# Altium PCB Stepper Teensy Breakout.PcbDoc
Units mm, origin at the board's own origin, x right, y up, seen from the top; angles counter-clockwise.
Board outline 195.58 x 98.55 mm, 2 copper layers (Top Layer, Bottom Layer); 39 components, 41 nets, 243 pads, 7 vias.
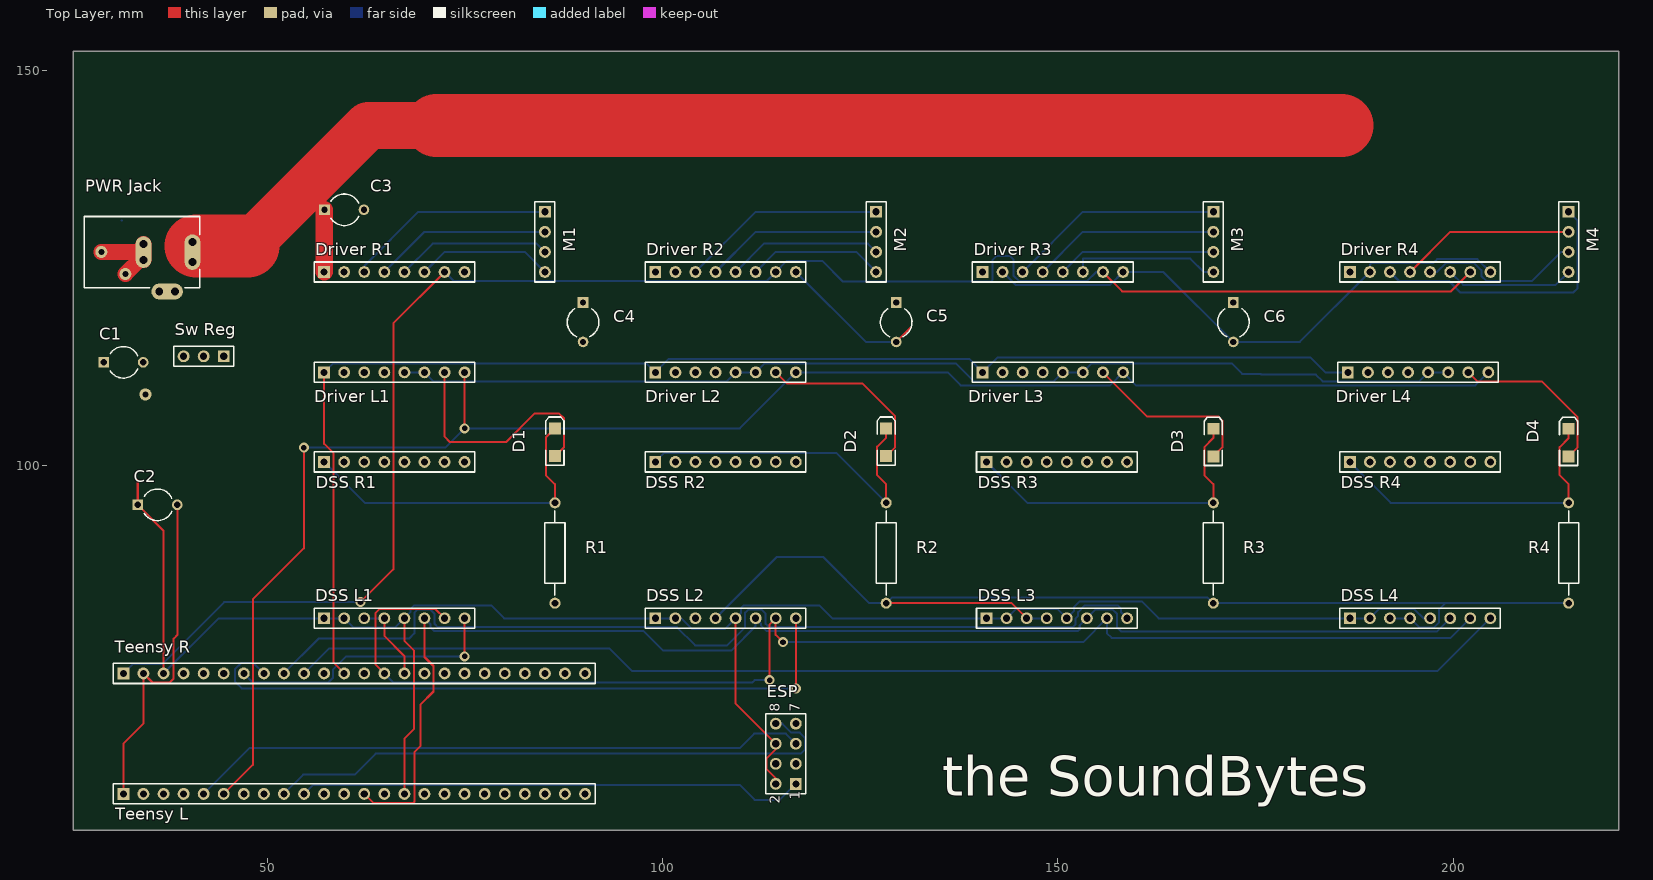
[diagram p0: Top Layer view]
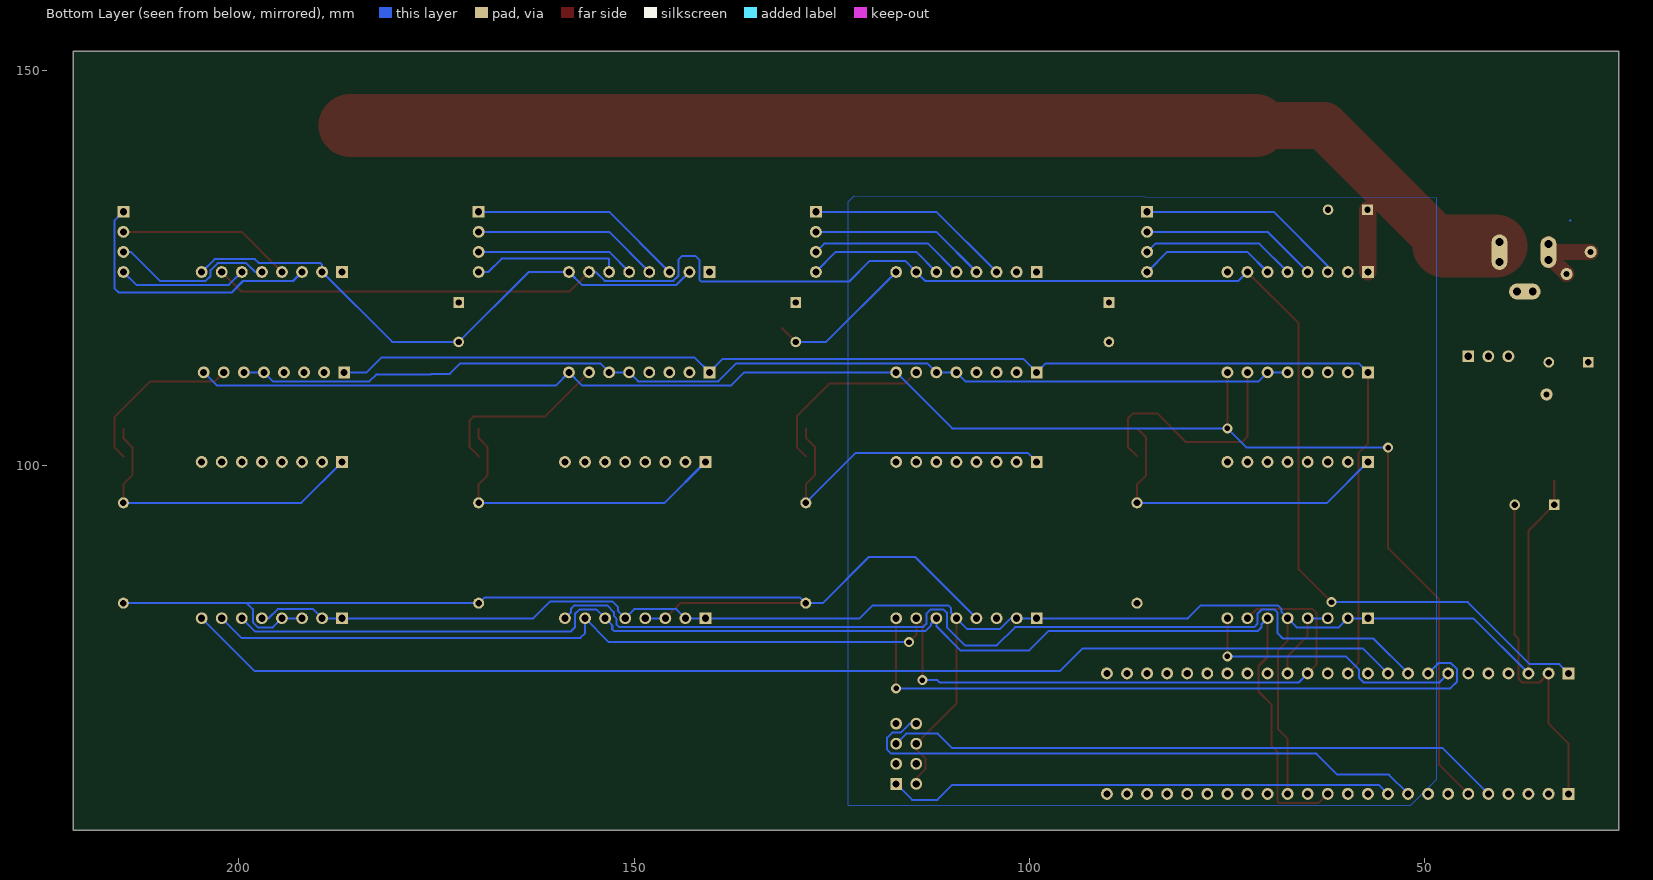
[diagram p1: Bottom Layer view, seen from below]

## Layer stack, top to bottom
Top Solder: solder mask 0.0102, Solder Resist, Dk 3.5
Top Layer: signal copper 0.0356
Dielectric 1: dielectric 0.32, FR-4, Dk 4.8
Bottom Layer: signal copper 0.0356
Bottom Solder: solder mask 0.0102, Solder Resist, Dk 3.5

## Board outline
25.4,53.848 220.98,53.848 220.98,152.4 25.4,152.4

## Design rules (kind name [scope] priority, off if disabled: settings)
Clearance [All] p1: gap=0.254
PolygonConnect [All] p1: connectstyle=Relief reliefconductorwidth=0.254 reliefentries=4 polygonreliefangle="90 Angle" airgapwidth=0.254
RoutingVias [All] p1: holewidth=0.711 width=1.27 viastyle="Through Hole" minholewidth=0.711 minwidth=1.27 maxholewidth=0.711 maxwidth=1.27
SolderMaskExpansion [All] p1: expansion=0.102
Width Width_1 [InNet('VMOT')] p1: maxlimit=0.254 minlimit=0.254 preferedwidth=0.254 minimp=50.000000 maximp=50.000000 favimp=50.000000
Width [InNet('VMOT')] p2: maxlimit=8.2 minlimit=7.6 preferedwidth=8 minimp=50.000000 maximp=50.000000 favimp=50.000000
30 further rules are at their usual default settings.

## Components (designator, comment, footprint, x,y, rotation, side; value= is the part's Value field where it differs from the comment)
C1 "Cap2" CAPR5-4X5 31.75,113.03 r0 top
C2 "Cap2" CAPR5-4X5 36.068,94.996 r0 top
C3 "" CAPR5-4X5 59.69,132.334 r0 top
C4 "Cap2" CAPR5-4X5 89.916,118.11 r270 top
C5 "Cap2" CAPR5-4X5 129.54,118.11 r270 top
C6 "Cap2" CAPR5-4X5 172.212,118.11 r270 top
D1 "LED2" 3.2X1.6X1.1 86.36,102.91 r90 top
D2 "LED2" 3.2X1.6X1.1 128.27,102.91 r90 top
D3 "LED2" 3.2X1.6X1.1 169.672,102.87 r90 top
D4 "LED2" 3.2X1.6X1.1 214.63,102.87 r90 top
"Driver L1" "Header 8" HDR1X8 57.15,111.76 r0 top locked
"Driver L2" "Header 8" HDR1X8 99.06,111.76 r0 top locked
"Driver L3" "Header 8" HDR1X8 140.462,111.76 r0 top locked
"Driver L4" "Header 8" HDR1X8 186.69,111.76 r0 top locked
"Driver R1" "Header 8" HDR1X8 57.15,124.46 r0 top locked
"Driver R2" "Header 8" HDR1X8 99.06,124.46 r0 top locked
"Driver R3" "Header 8" HDR1X8 140.462,124.46 r0 top locked
"Driver R4" "Header 8" HDR1X8 186.944,124.46 r0 top locked
"DSS L1" "Header 8" HDR1X8 57.15,80.645 r0 top locked
"DSS L2" "Header 8" HDR1X8 99.06,80.645 r0 top
"DSS L3" "Header 8" HDR1X8 140.97,80.645 r0 top locked
"DSS L4" "Header 8" HDR1X8 186.944,80.645 r0 top
"DSS R1" "Header 8" HDR1X8 57.15,100.42 r0 top locked
"DSS R2" "Header 8" HDR1X8 99.06,100.42 r0 top
"DSS R3" "Header 8" HDR1X8 140.97,100.42 r0 top
"DSS R4" "Header 8" HDR1X8 186.944,100.42 r0 top
ESP "Header 4X2" HDR2X4 116.84,59.69 r90 top
M1 "Header 4" HDR1X4 85.09,132.08 r270 top (schematic designator "Motor 1")
M2 "Header 4" HDR1X4 127,132.08 r270 top (schematic designator "Motor 2")
M3 "Header 4" HDR1X4 169.672,132.08 r270 top (schematic designator "Motor 3")
M4 "Header 4" HDR1X4 214.63,132.08 r270 top (schematic designator "Motor 4")
"PWR Jack" "PWR2.5" KLD-0202 26.79,126.984 r0 top
R1 "Res Semi" AXIAL-0.5 86.36,88.9 r90 top
R2 "Res Semi" AXIAL-0.5 128.27,88.9 r90 top
R3 "Res Semi" AXIAL-0.5 169.672,88.9 r90 top
R4 "Res Semi" AXIAL-0.5 214.63,88.9 r90 top
"Sw Reg" "Header 3" HDR1X3 44.45,113.792 r180 top
"Teensy L" "Header 24" HDR1X24 31.75,58.42 r0 top locked
"Teensy R" "Header 24" HDR1X24 31.75,73.66 r0 top locked

## Footprints (in the part's own frame and the unit in brackets; to place one, negate y for a bottom-side part, rotate by r counter-clockwise, add the part's x,y. Pads: shape width x height; smd on the part's side, far side on the other; paste and mask are expansions set on the pad)
3.2X1.6X1.1 [mm] "SMT LED; 2 Flat Leads"
  rect 1.5x1.5 smd: 1(-1.75,0) 2(1.75,0)
  silkscreen extent -2.9,-1.15 3.2,1.15
AXIAL-0.5 [mm] "Axial Device, Thru-Hole; 2 Leads; 0.5 in Pin Spacing"
  round 1.4 hole 0.85: 1(-6.35,0) 2(6.35,0)
  silkscreen extent -5.33,-1.27 5.33,1.27
CAPR5-4X5 [mm] "Capacitor; 2 Leads"
  rect 1.35x1.35 hole 0.8: 1(-2.5,0)
  round 1.35 hole 0.8: 2(2.5,0)
  silkscreen extent -1.69,-2 1.82,2
HDR1X3 [mm] "Connector; Header; 3 Position"
  rect 1.5x1.5 hole 0.9: 1(0,0)
  round 1.5 hole 0.9: 2(2.54,0) 3(5.08,0)
  silkscreen extent -1.27,-1.27 6.35,1.27
HDR1X4 [mm] "Connector; Header; 4 Position"
  rect 1.5x1.5 hole 0.9: 1(0,0)
  round 1.5 hole 0.9: 2(2.54,0) 3(5.08,0) 4(7.62,0)
  silkscreen extent -1.27,-1.27 8.89,1.27
HDR1X8 [mm] "Connector; Header; 8 Position"
  rect 1.5x1.5 hole 0.9: 1(0,0)
  round 1.5 hole 0.9: 2(2.54,0) 3(5.08,0) 4(7.62,0) 5(10.16,0) 6(12.7,0) 7(15.24,0) 8(17.78,0)
  silkscreen extent -1.27,-1.27 19.05,1.27
HDR1X24 [mm] "Connector; Header; 24 Position"
  rect 1.5x1.5 hole 0.9: 1(0,0)
  round 1.5 hole 0.9: 2(2.54,0) 3(5.08,0) 4(7.62,0) 5(10.16,0) 6(12.7,0) 7(15.24,0) 8(17.78,0) 9(20.32,0) 10(22.86,0) 11(25.4,0) 12(27.94,0) 13(30.48,0) 14(33.02,0) 15(35.56,0) 16(38.1,0) 17(40.64,0) 18(43.18,0) 19(45.72,0) 20(48.26,0) 21(50.8,0) 22(53.34,0) 23(55.88,0) 24(58.42,0)
  silkscreen extent -1.27,-1.27 59.69,1.27
HDR2X4 [mm] "Connector; Header; 4x2 Position"
  rect 1.5x1.5 hole 0.9: 1(0,0)
  round 1.5 hole 0.9: 2(0,2.54) 3(2.54,0) 4(2.54,2.54) 5(5.08,0) 6(5.08,2.54) 7(7.62,0) 8(7.62,2.54)
  silkscreen extent -1.27,-1.27 8.89,3.81
KLD-0202 [mm] "DC Power Jack, 2.5mm, KLD Series, PCB Mount"
  oval 2x4.5 all layers, no hole: 1(13.7,0)
  round 1.5 hole 1: 1A(13.7,-1.25) 1B(13.7,1.25) 2A(7.5,-1) 2B(7.5,1) 3A(9.5,-5) 3B(11.5,-5)
  oval 2x4 all layers, no hole: 2(7.5,0)
  oval 4x2 all layers, no hole: 3(10.5,-5)
  silkscreen extent 0,-4.5 14.6,4.5

## Part data
C1 C2 C4 C5 C6: "Capacitor"
C3: library part Cap2, "Capacitor"
D1 D2 D3 D4: "Typical RED, GREEN, YELLOW, AMBER GaAs LED"
"Driver L1" "Driver L2" "Driver L3" "Driver L4" "Driver R1" "Driver R2" "Driver R3" "Driver R4" "DSS L1" "DSS L2" "DSS L3" "DSS L4" "DSS R1" "DSS R2" "DSS R3" "DSS R4": "Header, 8-Pin"
ESP: "Header, 4-Pin, Dual row"
M1 M2 M3 M4: "Header, 4-Pin"
"PWR Jack": "Low Voltage Power Supply Connector"
R1 R2 R3 R4: "Semiconductor Resistor"
"Sw Reg": "Header, 3-Pin"
"Teensy L" "Teensy R": "Header, 24-Pin"

## Free pads (board coordinates)
  round 1.524 hole 0.762: 2(28.956,127) 3(32.004,124.206) 4(34.544,108.966)

## Via types
v1: diameter 1.27, hole 0.711, Top Layer to Bottom Layer, 7 vias

## Nets (pads, with @x,y where several pads share a name; then routed paths per layer and width w, separated by ;. In a path a pad name is that pad's centre, name@x,y a point inside that pad or via, vN(x,y) a via of type N, cw(c..) or ccw(c..) an arc to the next point about the centre after c; other vN are vias at no path point)
1A_A: "Driver R1.5" M1.3 | length 19.7
  Bottom Layer w0.254: 67.31,124.46 70.891,128.041 84.049,128.041 M1.3
1A_B: "Driver R2.5" M2.3 | length 19.7
  Bottom Layer w0.254: 109.22,124.46 112.801,128.041 125.959,128.041 M2.3
1A_C: "Driver R3.5" M3.3 | length 20.1
  Bottom Layer w0.254: 150.622,124.46 153.162,127 M3.3
1A_D: "Driver R4.5" M4.3 | length 20.9
  Bottom Layer w0.254: 197.104,124.46 197.968,124.46 199.099,125.591 202.692,125.591 203.593,124.69 203.593,123.952 204.216,123.329 210.019,123.329 213.69,127 M4.3
1B_A: "Driver R1.6" M1.4 | length 17.3
  Bottom Layer w0.254: 69.85,124.46 72.39,127 82.55,127 M1.4
1B_B: "Driver R2.6" M2.4 | length 17.3
  Bottom Layer w0.254: 111.76,124.46 114.3,127 124.46,127 M2.4
1B_C: "Driver R3.6" M3.4 | length 18.9
  Bottom Layer w0.254: 153.162,124.46 153.162,126.162 166.776,126.162 168.478,124.46 M3.4
1B_D: "Driver R4.6" M4.4 | length 16.3
  Bottom Layer w0.254: 199.644,124.46 201.283,122.821 212.991,122.821 M4.4
2A_A: "Driver R1.4" M1.2 | length 22.4
  Bottom Layer w0.254: 64.77,124.46 69.85,129.54 M1.2
2A_B: "Driver R2.4" M2.2 | length 22.4
  Bottom Layer w0.254: 106.68,124.46 111.76,129.54 M2.2
2A_C: "Driver R3.4" M3.2 | length 23.7
  Bottom Layer w0.254: 148.082,124.46 153.162,129.54 M3.2
2A_D: "Driver R4.4" M4.2 | length 22.2
  Top Layer w0.254: 194.564,124.46 199.644,129.54 M4.2
2B_A: "Driver R1.3" M1.1 | length 26.5
  Bottom Layer w0.254: 62.23,124.46 62.23,125.222 69.088,132.08 M1.1
2B_B: "Driver R2.3" M2.1 | length 26
  Bottom Layer w0.254: 104.14,124.46 111.76,132.08 M2.1
2B_C: "Driver R3.3" M3.1 | length 27.3
  Bottom Layer w0.254: 145.542,124.46 153.162,132.08 M3.1
2B_D: "Driver R4.3" M4.1 | length 35.2
  Bottom Layer w0.254: 192.024,124.46 193.167,123.317 199.492,123.317 200.939,121.869 215.214,121.869 215.773,122.428 215.773,130.937 M4.1
3V3: "DSS L1.1" "DSS L1.2" "DSS L1.5" "DSS L2.1" "DSS L2.2" "DSS L2.5" "DSS L3.1" "DSS L3.2" "DSS L3.5" "DSS L4.1" "DSS L4.2" "DSS L4.5" "Sw Reg.3" "Teensy L.15" "Teensy R.3" C2.1 ESP.2 ESP.6 | length 245.5
  Top Layer w0.254: 33.568,98.069 C2.1 36.83,91.734 36.83,73.66 ; 67.31,58.42 67.31,65.405 68.555,66.65 68.555,76.53 67.31,77.775 67.31,80.645 ; 109.22,80.645 109.22,69.85 ESP.6 114.3,64.059 113.157,62.916 113.157,61.544 114.3,60.401 ESP.2
  Bottom Layer w0.254: 36.83,73.66 43.815,80.645 57.15,80.645 59.69,80.645 60.833,79.502 66.167,79.502 67.31,80.645 68.072,81.407 68.072,81.776 68.58,82.284 78.295,82.284 79.934,80.645 99.06,80.645 101.6,80.645 102.356,80.645 103.685,79.316 107.891,79.316 109.22,80.645 109.887,81.312 109.887,81.935 110.236,82.284 119.824,82.284 121.463,80.645 140.97,80.645 143.51,80.645 144.653,81.788 149.987,81.788 151.13,80.645 152.031,81.546 152.031,82.042 152.781,82.792 160.616,82.792 162.763,80.645 186.944,80.645 189.484,80.645 190.627,81.788 195.123,81.788 196.266,80.645 197.104,80.645
5V: "Driver R1.7" "Driver R2.7" "Driver R3.7" "Driver R4.7" "Teensy R.1" | length 220.1
  Top Layer w0.254: v1(61.747,82.677) 65.913,86.843 65.913,117.983 72.39,124.46 ; 155.702,124.46 158.14,122.022 199.746,122.022 202.184,124.46
  Bottom Layer w0.254: 31.75,73.66 32.918,74.828 36.652,74.828 44.501,82.677 v1(61.747,82.677) ; 72.39,124.46 73.533,123.317 113.157,123.317 114.3,124.46 115.697,125.857 120.193,125.857 122.809,123.241 141.478,123.241 141.743,123.506 141.743,125.995 142.24,126.492 143.903,126.492 144.411,125.984 144.411,123.952 145.034,123.329 153.733,123.329 154.864,124.46 155.702,124.46
CS1: "DSS L1.8" "Teensy R.7" | length 35.2
  Top Layer w0.254: v1(74.93,75.819) 74.93,80.645
  Bottom Layer w0.254: 46.99,73.66 48.133,72.517 57.658,72.517 58.293,73.152 58.293,74.168 59.944,75.819 v1(74.93,75.819)
CS2: "DSS L2.8" "Teensy R.8" | length 86.3
  Top Layer w0.254: v1(116.84,71.78) 116.84,80.645
  Bottom Layer w0.254: 49.53,73.66 48.209,74.981 46.66,74.981 45.847,74.168 45.847,72.644 46.711,71.78 v1(116.84,71.78)
CS3: "DSS L3.8" "Teensy R.9" | length 121.7
  Bottom Layer w0.254: 52.07,73.66 56.49,78.08 67.92,78.08 68.58,78.74 68.58,81.356 69,81.776 70.548,81.776 71.12,81.204 71.12,79.934 71.54,79.514 101.797,79.514 104.095,77.216 108.153,77.216 110.439,79.502 110.439,81.356 110.859,81.776 112.458,81.776 113.03,81.204 113.03,79.934 113.45,79.514 151.892,79.514 152.261,79.883 152.261,80.645 152.552,80.936 152.552,81.42 153.416,82.284 157.57,82.284 157.988,81.866 157.988,81.407 158.75,80.645
CS4: "DSS L4.8" "Teensy R.10" | length 155.4
  Bottom Layer w0.254: 54.61,73.66 57.785,76.835 93.243,76.835 96.139,73.939 198.018,73.939 204.724,80.645
DIR: "Driver L1.8" "Driver L2.8" "Driver L3.8" "Driver L4.8" "Teensy L.6" | length 211.6
  Top Layer w0.254: 44.45,58.42 48.133,62.103 48.133,83.033 54.585,89.484 v1(54.585,102.235) ; v1(74.93,104.673) 74.93,111.76
  Bottom Layer w0.254: v1(54.585,102.235) 72.492,102.235 v1(74.93,104.673) 109.753,104.673 116.84,111.76 136.068,111.76 137.707,110.121 156.603,110.121 158.242,111.76 159.881,110.121 202.831,110.121 204.47,111.76
ENA: "Driver L1.1" "Driver L2.1" "Driver L3.1" "Driver L4.1" "Teensy R.12" | length 172.6
  Top Layer w0.254: 57.15,111.76 57.15,102.718 58.344,101.524 58.344,75.006 59.69,73.66
  Bottom Layer w0.254: 57.15,111.76 58.293,112.903 97.917,112.903 99.06,111.76 100.762,113.462 138.76,113.462 140.462,111.76 142.367,113.665 181.946,113.665 183.851,111.76 186.69,111.76
GND: "Driver R1.2" "Driver R1.8" "Driver R2.2" "Driver R2.8" "Driver R3.2" "Driver R3.8" "Driver R4.2" "Driver R4.8" "DSS L1.3" "DSS L1.4" "DSS L2.3" "DSS L2.4" "DSS L3.3" "DSS L3.4" "DSS L4.3" "DSS L4.4" "PWR Jack.2" "PWR Jack.2A" "PWR Jack.2B" "Sw Reg.2" "Teensy L.1" "Teensy R.2" "Teensy R.15" C1.2 C2.2 C3.2 C4.2 C5.2 C6.2 ESP.7 pad.2 pad.3 pad.4 R1.1 R2.1 R3.1 R4.1 | length 299.5
  Top Layer w0.254: 31.75,58.42 31.75,64.77 34.29,67.31 34.29,73.66 35.433,72.517 37.592,72.517 38.1,73.025 38.1,78.054 38.568,78.522 C2.2 ; pad.4@34.25,109.26 pad.4 ; 64.77,80.645 64.77,78.41 67.31,75.87 67.31,73.66 ; R2.1 144.145,82.55 146.05,80.645 ; C5.2 131.303,117.373
  Top Layer w2: pad.2 33.274,127 33.29,126.984 ; pad.3 34.036,126.238 ; 34.29,125.984 34.036,126.238 ; 34.29,127.984 34.29,126.984 34.29,126.492 34.036,126.238
  Bottom Layer w0.254: 62.23,80.645 64.77,80.645 ; 106.68,80.645 114.427,88.392 120.294,88.392 126.136,82.55 R2.1 129.02,83.3 168.922,83.3 R3.1 199.009,82.55 ; 116.84,124.46 125.69,115.61 C5.2 ; 143.002,124.46 144.641,122.821 156.603,122.821 158.242,124.46 163.362,124.46 C6.2 180.634,115.61 189.484,124.46 189.484,125.349 189.738,125.603 197.509,125.603 198.005,126.099 203.085,126.099 204.724,124.46 ; 146.05,80.645 148.59,80.645 ; 192.024,80.645 194.564,80.645 195.707,79.502 197.612,79.502 198.247,80.137 198.247,81.788 199.009,82.55 ; R4.1 199.009,82.55
NetD1_1: "Driver L1.7" D1.1 | length 30.5
  Top Layer w0.254: 72.39,111.76 72.39,103.632 73.076,102.946 80.188,102.946 83.82,106.578 86.868,106.578 87.503,105.943 87.503,102.303 D1.1
NetD2_1: "Driver L2.7" D2.1 | length 22.9
  Top Layer w0.254: 114.3,111.76 115.697,110.363 125.273,110.363 129.413,106.223 129.413,102.303 D2.1
NetD3_1: "Driver L3.7" D3.1 | length 22.7
  Top Layer w0.254: 155.702,111.76 161.265,106.197 170.282,106.197 170.815,105.664 170.815,102.263 D3.1
NetD4_1: "Driver L4.7" D4.1 | length 21.6
  Top Layer w0.254: 201.93,111.76 203.073,110.617 211.252,110.617 215.773,106.096 215.773,102.263 D4.1
"NetPWR Jack_3": "PWR Jack.3" "PWR Jack.3A" "PWR Jack.3B" | length 0
  Bottom Layer w0.254: 31.535,131 31.572,131
PIN3: "Teensy L.5" ESP.5 | length 78.6
  Bottom Layer w0.254: 41.91,58.42 47.701,64.211 109.728,64.211 111.557,66.04 115.57,66.04 ESP.5
PIN7: "Teensy L.9" ESP.8 | length 74.2
  Bottom Layer w0.254: 52.07,58.42 54.508,60.858 61.036,60.858 63.678,63.5 117.475,63.5 117.983,64.008 117.983,65.544 117.348,66.179 116.269,66.179 115.138,67.31 ESP.8
PIN8: "Teensy L.10" ESP.1 | length 64.3
  Bottom Layer w0.254: 54.61,58.42 55.753,59.563 109.728,59.563 111.633,57.658 114.808,57.658 ESP.1
RESET: "Driver L1.5" "Driver L1.6" "Driver L2.5" "Driver L2.6" "Driver L3.5" "Driver L3.6" "Driver L4.5" "Driver L4.6" | length 136.8
  Bottom Layer w0.254: 67.31,111.76 69.85,111.76 71.018,110.592 108.052,110.592 109.22,111.76 111.76,111.76 112.903,112.903 137.057,112.903 139.331,110.629 149.491,110.629 150.622,111.76 153.162,111.76 154.305,112.903 171.983,112.903 173.304,111.582 175.641,111.582 175.743,111.481 182.651,111.481 183.503,110.629 195.719,110.629 196.85,111.76 199.39,111.76
SCK: "DSS L1.7" "DSS L2.7" "DSS L3.7" "DSS L4.7" "Teensy R.14" | length 169.9
  Top Layer w0.254: 64.77,73.66 63.627,74.803 63.627,81.28 64.135,81.788 71.247,81.788 72.39,80.645 ; v1(113.538,72.807) 113.538,79.883 114.3,80.645 114.3,78.537 v1(115.214,77.622)
  Bottom Layer w0.254: 64.77,73.66 65.913,72.517 111.347,72.517 111.637,72.807 v1(113.538,72.807) ; v1(115.214,77.622) 153.187,77.622 156.21,80.645 156.21,78.74 156.794,78.156 199.695,78.156 202.184,80.645
SDA: "DSS L1.6" "DSS L2.6" "DSS L3.6" "DSS L4.6" "Teensy L.13" | length 170.6
  Top Layer w0.254: 62.23,58.42 63.373,57.277 68.453,57.277 68.58,57.404 68.58,63.703 69.342,64.465 69.342,69.723 70.993,71.374 70.993,74.6 69.85,75.743 69.85,80.645
  Bottom Layer w0.254: 69.85,80.645 70.612,79.883 70.612,79.514 71.12,79.006 97.587,79.006 100.041,76.552 108.643,76.552 111.76,79.669 111.76,80.645 112.427,79.978 112.427,79.756 113.177,79.006 152.527,79.006 152.769,79.248 152.769,79.744 153.67,80.645 154.801,81.776 156.908,81.776 157.48,81.204 157.48,79.502 157.988,78.994 197.993,78.994 199.644,80.645
STEP1: "DSS R1.1" D1.2 R1.2 | length 41.7
  Top Layer w0.254: R1.2 86.36,97.612 85.217,98.755 85.217,103.517 D1.2
  Bottom Layer w0.254: 57.15,100.42 62.32,95.25 R1.2
STEP2: "DSS R2.1" D2.2 R2.2 | length 42.7
  Top Layer w0.254: R2.2 128.27,97.612 127.127,98.755 127.127,102.362 128.27,103.505 D2.2
  Bottom Layer w0.254: 99.06,100.42 100.215,101.575 121.945,101.575 R2.2
STEP3: "DSS R3.1" D3.2 R3.2 | length 41.2
  Top Layer w0.254: R3.2 169.672,97.612 168.529,98.755 168.529,102.311 169.672,103.454 D3.2
  Bottom Layer w0.254: 140.97,100.42 146.14,95.25 R3.2
STEP4: "DSS R4.1" D4.2 R4.2 | length 40.1
  Top Layer w0.254: R4.2 214.63,97.612 213.487,98.755 213.487,102.311 214.63,103.454 D4.2
  Bottom Layer w0.254: 186.944,100.42 192.114,95.25 R4.2
VMOT: "Driver R1.1" "Driver R2.1" "Driver R3.1" "Driver R4.1" "PWR Jack.1" "PWR Jack.1A" "PWR Jack.1B" "Sw Reg.1" C1.1 C3.1 C4.1 C5.1 C6.1 | length 161.3
  Top Layer w0.254: 40.49,128.234 40.962,127.762 ; 57.15,124.46 57.19,124.5 ; 185.928,143.002 186.944,141.986
  Top Layer w2.2: 57.19,124.5 C3.1
  Top Layer w6: 47.498,127.762 62.738,143.002 71.374,143.002
  Top Layer w8: 40.962,127.762 47.498,127.762 ; 71.374,143.002 185.928,143.002
pads on no net: "Driver L1.2" "Driver L1.3" "Driver L1.4" "Driver L2.2" "Driver L2.3" "Driver L2.4" "Driver L3.2" "Driver L3.3" "Driver L3.4" "Driver L4.2" "Driver L4.3" "Driver L4.4" "DSS R1.2" "DSS R1.3" "DSS R1.4" "DSS R1.5" "DSS R1.6" "DSS R1.7" "DSS R1.8" "DSS R2.2" "DSS R2.3" "DSS R2.4" "DSS R2.5" "DSS R2.6" "DSS R2.7" "DSS R2.8" "DSS R3.2" "DSS R3.3" "DSS R3.4" "DSS R3.5" "DSS R3.6" "DSS R3.7" "DSS R3.8" "DSS R4.2" "DSS R4.3" "DSS R4.4" "DSS R4.5" "DSS R4.6" "DSS R4.7" "DSS R4.8" "Teensy L.2" "Teensy L.3" "Teensy L.4" "Teensy L.7" "Teensy L.8" "Teensy L.11" "Teensy L.12" "Teensy L.14" "Teensy L.16" "Teensy L.17" "Teensy L.18" "Teensy L.19" "Teensy L.20" "Teensy L.21" "Teensy L.22" "Teensy L.23" "Teensy L.24" "Teensy R.4" "Teensy R.5" "Teensy R.6" "Teensy R.11" "Teensy R.13" "Teensy R.16" "Teensy R.17" "Teensy R.18" "Teensy R.19" "Teensy R.20" "Teensy R.21" "Teensy R.22" "Teensy R.23" "Teensy R.24" ESP.3 ESP.4

## Polygon pours and split planes (outlines as drawn)
GND on Bottom Layer "GND" (hatched 90Degree grid 0.508 track 0.203, shelved, pour order 0): 48.514,133.858 48.514,60.198 51.816,56.896 122.936,56.896 122.936,133.35 122.174,134.112

## Silkscreen, mask and mechanical layers (free items; w line width, h text height)
Top Overlay:
  text "the SoundBytes" at 135.382,58.166 h5

## Text inside footprints (layer, text, board x,y; h text height)
ESP: Top Overlay "2" at 114.808,57.15 h1.27 r90; Top Overlay "1" at 117.348,57.658 h1.27 r90; Top Overlay "7" at 117.348,68.834 h1.27 r90; Top Overlay "8" at 114.808,68.834 h1.27 r90
"PWR Jack": Mechanical 1 "Mech 2 - Clearance, move to internal plane if present" at 27.076,132.05 h0.3; Mechanical 1 "Mech 1 - Slot cut-out" at 27.076,132.55 h0.3; Mechanical 1 "Assign keep-out area to slot" at 27.076,133.55 h0.3; Mechanical 1 "Alert PCB fab to slot details" at 27.076,133.05 h0.3